# Altium PCB PCB_HUMA-mini.PcbDoc
Units mm, origin at the board's own origin, x right, y up, seen from the top; angles counter-clockwise.
Board outline 50 x 50 mm, 2 copper layers (Top Layer, Bottom Layer); 54 components, 58 nets, 188 pads, 30 vias.
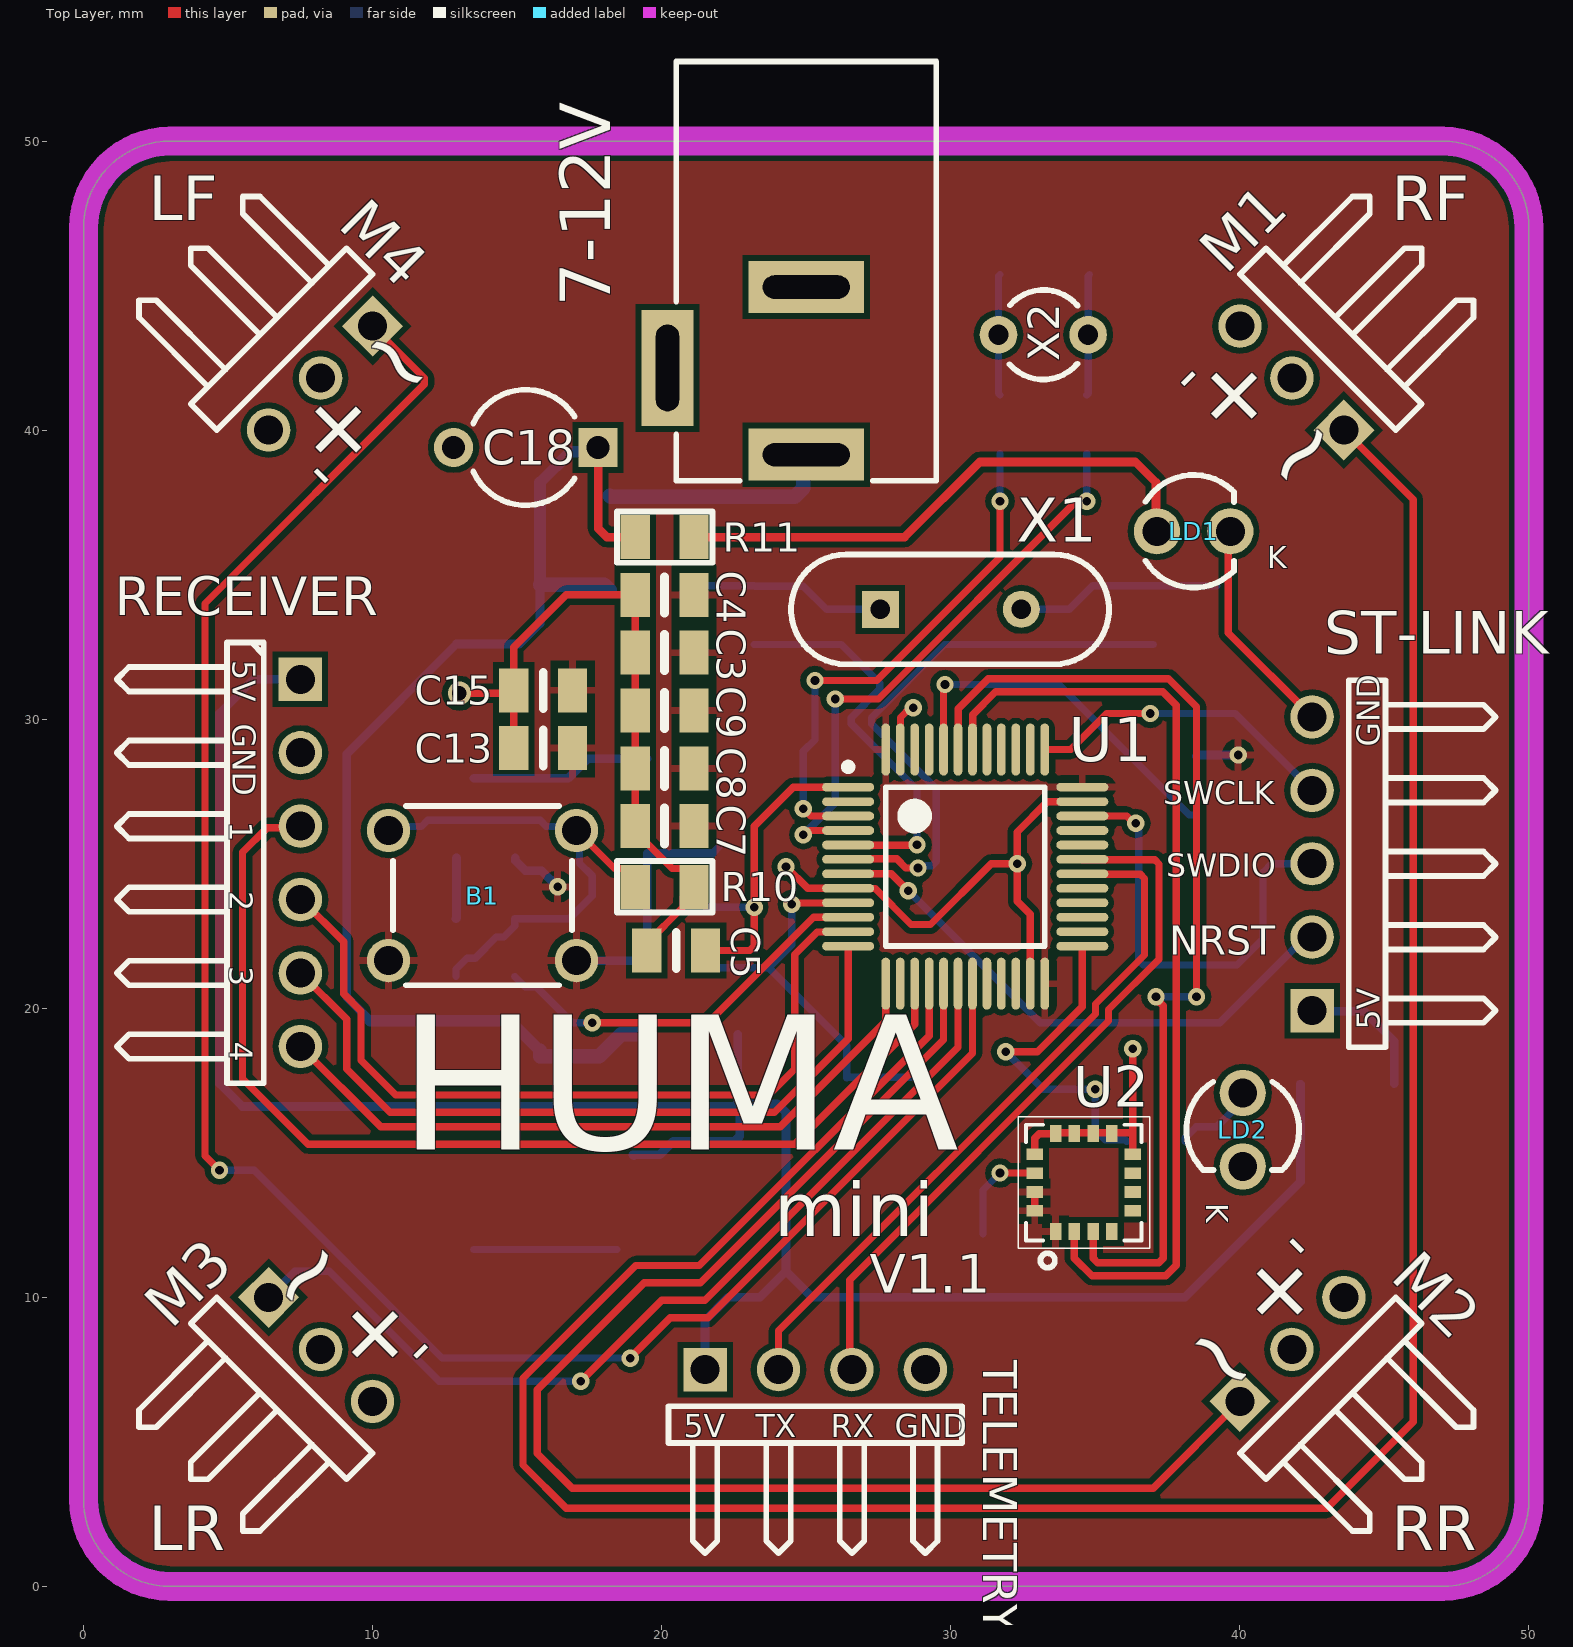
[diagram p0: Top Layer view]
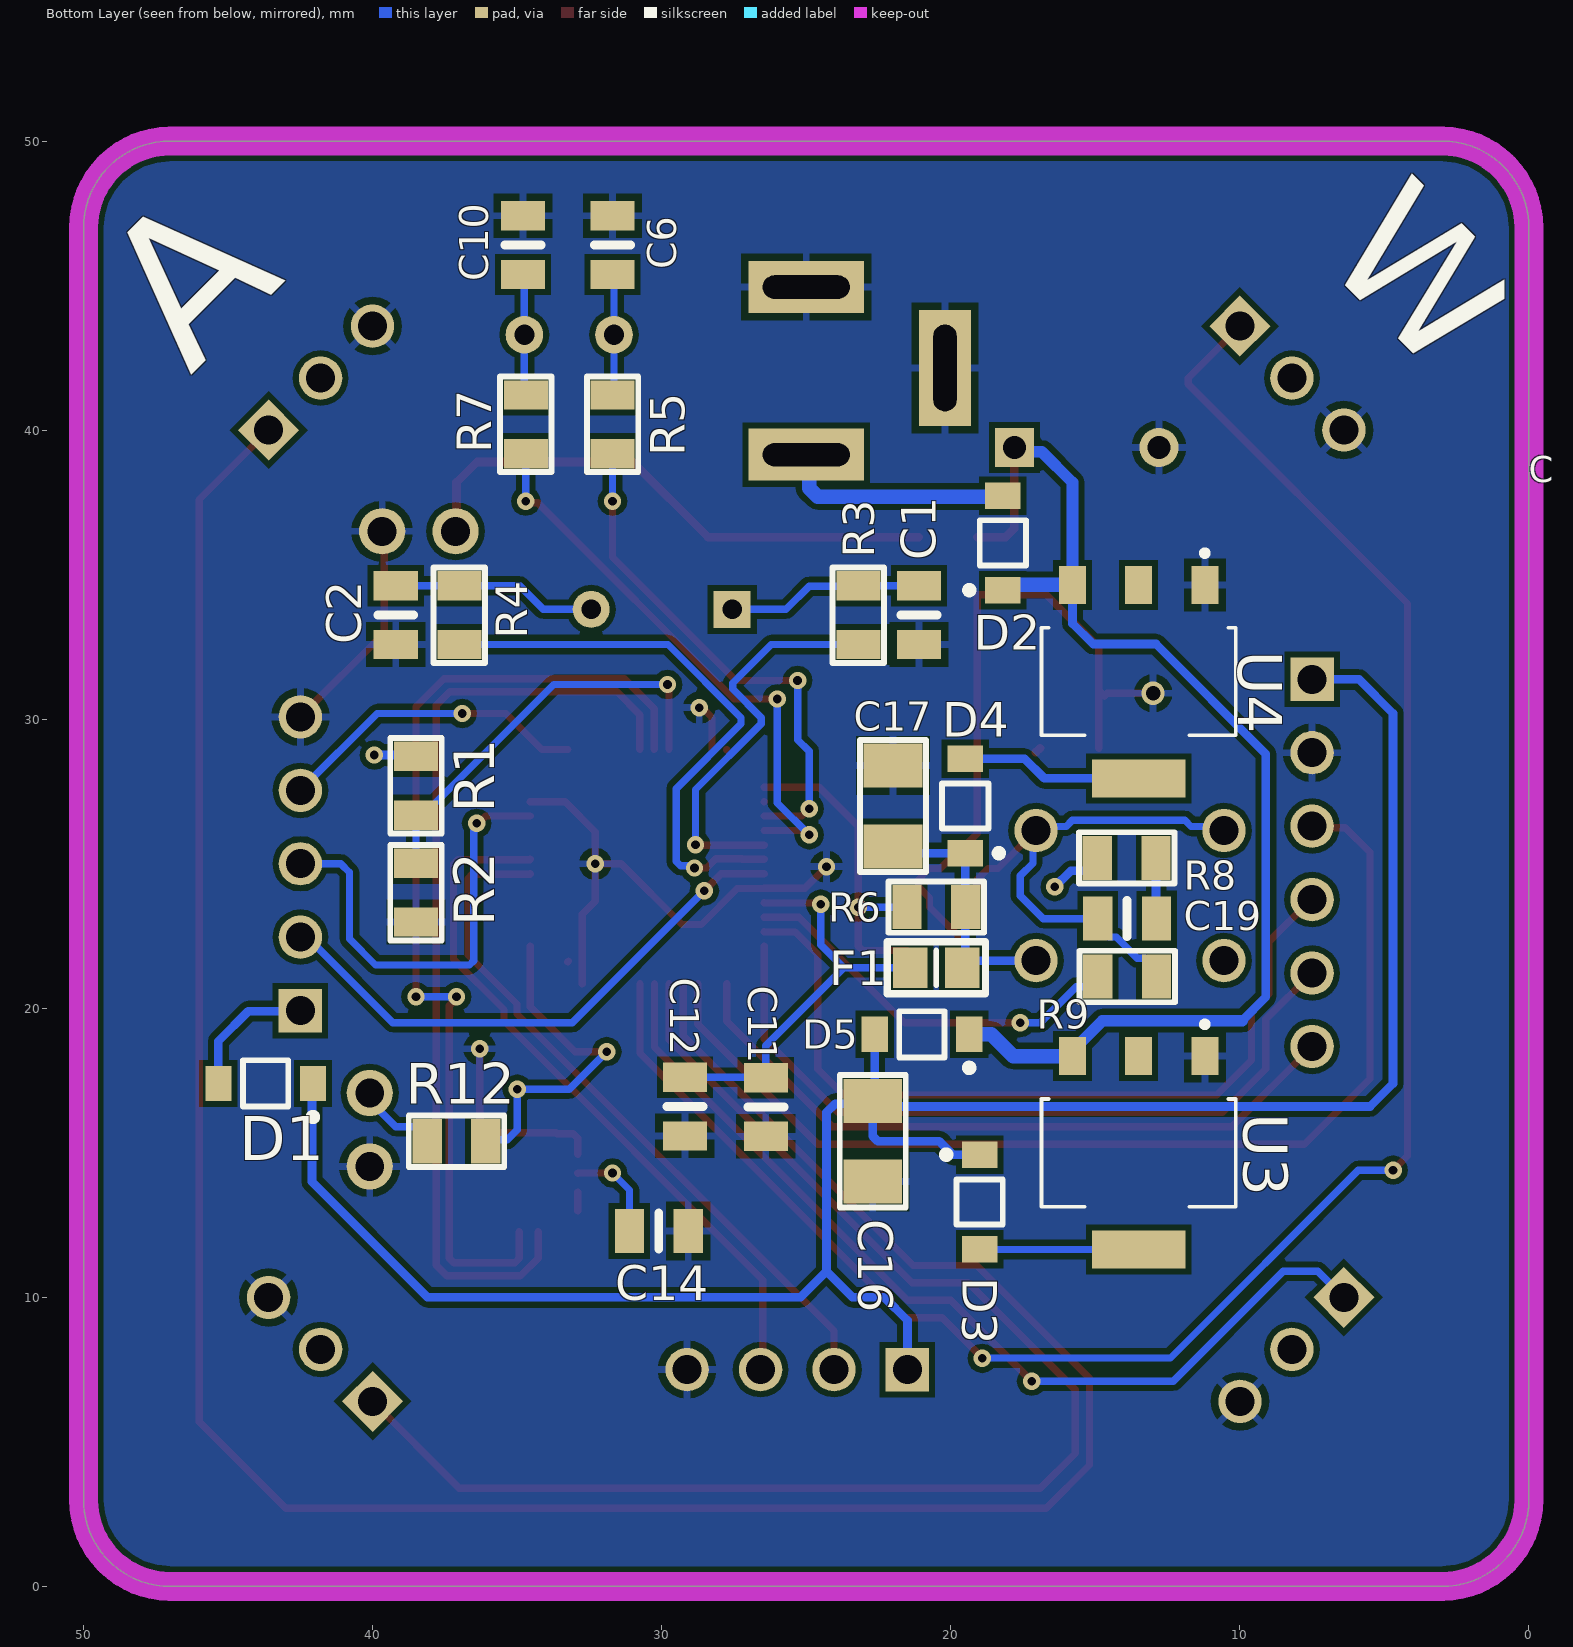
[diagram p1: Bottom Layer view, seen from below]
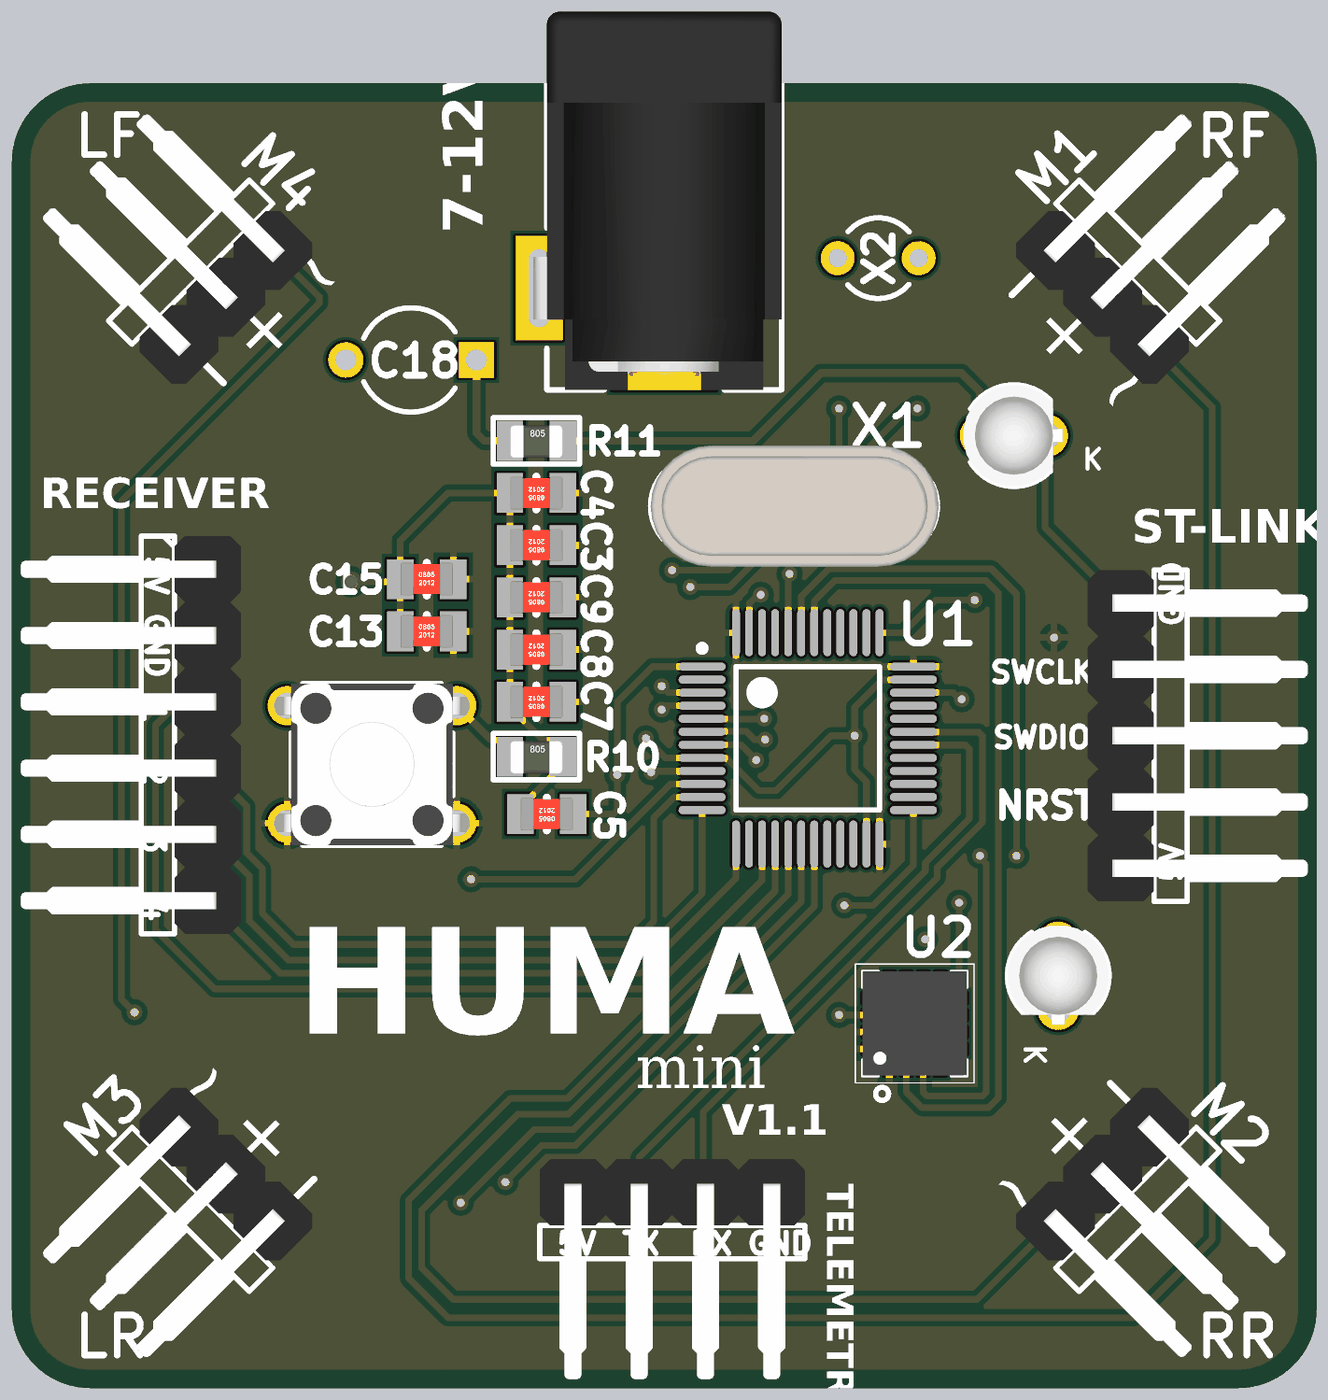
[diagram p2: 3D render of the assembled board from above, using the file's embedded part models]
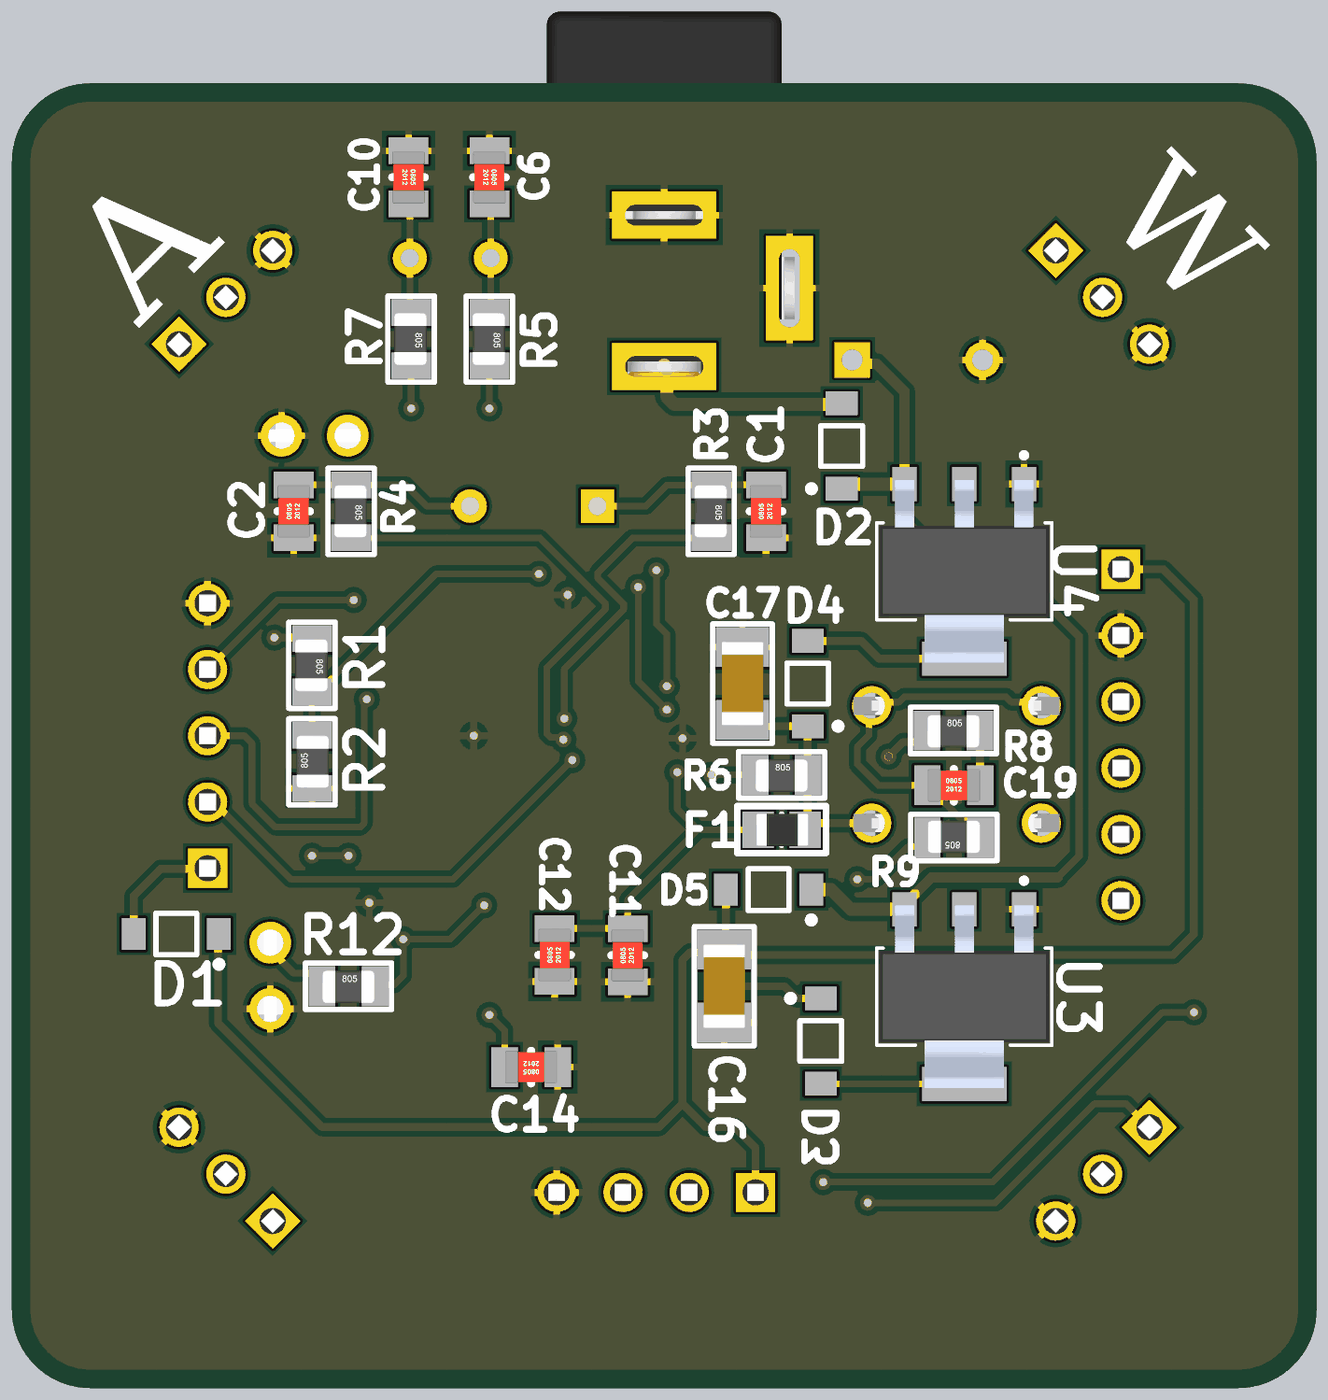
[diagram p3: 3D render of the assembled board from below, using the file's embedded part models]

## Layer stack, top to bottom
Top Solder: solder mask 0.0102, Solder Resist, Dk 3.5
Top Layer: signal copper 0.0356
Dielectric 1: dielectric 0.32, FR-4, Dk 4.8
Bottom Layer: signal copper 0.0356
Bottom Solder: solder mask 0.0102, Solder Resist, Dk 3.5

## Board outline
0,3 0,47 cw(c3,47) 3,50 47,50 cw(c47,47) 50,47 50,3 cw(c47,3) 47,0 3,0 cw(c3,3)

## Design rules (kind name [scope] priority, off if disabled: settings)
Clearance [All] p1: gap=0.2 ignorepadtopadclearanceinfootprint=FALSE except(0: Arc-Hole Track-Hole SMDPad-Hole THPad-Hole Via-Hole Fill-Hole Poly-Hole Region-Hole Text-Hole)
PolygonConnect [All] p1: connectstyle=Relief reliefconductorwidth=0.254 reliefentries=4 polygonreliefangle="90 Angle" airgapwidth=0.254
RoutingVias [All] p1: holewidth=0.711 width=1.27 viastyle="Through Hole" minholewidth=0.711 minwidth=1.27 maxholewidth=0.711 maxwidth=1.27
SolderMaskExpansion [All] p1: expansion=0.102 istentingtop=FALSE
Width [All] p1: maxlimit=0.5 minlimit=0.2 preferedwidth=0.254 minimp=50.000000 maximp=50.000000 favimp=50.000000
30 further rules are at their usual default settings.

## Classes and differential pairs
component class U_Power_HUMA: 7-12V C16 C17 C18 D2 D3 D4 D5 LD1 R11 U3 U4
component class U_Peripherals_HUMA: B1 C13 C14 C15 C19 D1 M1 M2 M3 M4 R8 R9 R10 RECEIVER ST-LINK TELEMETRY U2
component class Schematics_HUMA-mini: C1 C2 C3 C4 C5 C6 C7 C8 C9 C10 C11 C12 F1 LD2 R1 R2 R3 R4 R5 R6 R7 R12 U1 X1 X2

## Components (designator, comment, footprint, x,y, rotation, side; value= is the part's Value field where it differs from the comment)
7-12V "DC Power Jack" 694106301002 25,45.5 r180 top (schematic designator J8)
B1 "WS-TATV THT" 4301x60507x6 13.8,23.9 r180 top
C1 "20pF" SMD-0805C 21.1,33.6 r180 bottom
C2 "20pF" SMD-0805C 39.2,33.6 r180 bottom
C3 "0.10µF" SMD-0805C 20.1,32.3 r90 top
C4 "0.10µF" SMD-0805C 20.1,34.3 r90 top
C5 "1µF" SMD-0805C 20.5,22 r90 top
C6 "6.8pF" SMD-0805C 31.7,46.4 r0 bottom
C7 "0.10µF" SMD-0805C 20.1,26.3 r90 top
C8 "0.10µF" SMD-0805C 20.1,28.3 r90 top
C9 "0.10µF" SMD-0805C 20.1,30.3 r90 top
C10 "6.8pF" SMD-0805C 34.8,46.4 r0 bottom
C11 "1µF" SMD-0805C 26.4,16.584 r180 bottom
C12 "0.10µF" SMD-0805C 29.2,16.6 r180 bottom
C13 "0.10µF" SMD-0805C 15.9,29 r270 top
C14 "10000pF" SMD-0805C 30.1,12.3 r90 bottom
C15 "10µF" SMD-0805C 15.9,31 r270 top
C16 "22µF" SMD-1206C 22.7,15.4 r0 bottom
C17 "22µF" SMD-1206C 22,27 r180 bottom
C18 "Cap2" CAPR5-4X5 15.3,39.4 r180 top value=100uF
C19 "0.10µF" SMD-0805C 13.9,23.1 r270 bottom
D1 "MBR0520-HT" ONSC-SOD-123-2-425-04_V 43.7,17.4 r0 bottom
D2 "MBR0520-HT" ONSC-SOD-123-2-425-04_V 18.2,36.1 r90 bottom
D3 "MBR0520-HT" ONSC-SOD-123-2-425-04_V 19,13.3 r270 bottom
D4 "MBR0520-HT" ONSC-SOD-123-2-425-04_V 19.5,27 r90 bottom
D5 "MBR0520-HT" ONSC-SOD-123-2-425-04_V 21,19.1 r0 bottom
F1 "FERRITE BEAD 600 OHM 1206 1LN" IND_0805 20.5,21.4 r0 bottom
LD1 "Red" "Type 3mm" 38.4,36.5 r0 top
LD2 "Light Blue" "Type 3mm" 40.1,15.8 r270 top
M1 "ESC1 Connector" HDR1X3H 43.596,40.004 r135 top
M2 "ESC2 Connector" HDR1X3H 40.004,6.404 r45 top
M3 "ESC3 Connector" HDR1X3H 6.404,9.996 r315 top
M4 "ESC4 Connector" HDR1X3H 9.996,43.596 r225 top
R1 "10k" SMD-0805-RES 38.5,27.7 r0 bottom
R2 "510" SMD-0805-RES 38.5,24 r180 bottom
R3 "0.0" SMD-0805-RES 23.2,33.6 r0 bottom
R4 "220" SMD-0805-RES 37,33.6 r0 bottom
R5 "0.0" SMD-0805-RES 31.7,40.2 r0 bottom
R6 "0.0" SMD-0805-RES 20.5,23.5 r270 bottom
R7 "0.0" SMD-0805-RES 34.7,40.2 r0 bottom
R8 "100" SMD-0805-RES 13.916,25.2 r270 bottom
R9 "330" SMD-0805-RES 13.9,21.1 r90 bottom
R10 "220k" SMD-0805-RES 20.1,24.2 r270 top
R11 "470" SMD-0805-RES 20.1,36.3 r270 top
R12 "220" SMD-0805-RES 37.1,15.4 r270 bottom
RECEIVER "R9DS Receiver Connector" HDR1X6H 7.5,31.38 r270 top (schematic designator J7)
ST-LINK "Header 5H" HDR1X5H 42.5,19.92 r90 top (schematic designator J1)
TELEMETRY "433MHz Air Connector" HDR1X4H 21.5,7.5 r0 top (schematic designator J6)
U1 "STM32F303CCT6" STM-LQFP48_N 30.5,24.9 r0 top
U2 "L3GD20TR" LGA16C65P6X6_400X400X100 34.5,14 r90 top
U3 "AMS1117_5V" *SOT229P700X180-4N 13.5,15 r0 bottom
U4 "AMS1117_3V3" *SOT229P700X180-4N 13.5,31.3 r0 bottom
X1 "8MHz" OSC488W43P488L465H350Q2P 30,33.8 r0 top
X2 "XTAL" R38 33.2,43.3 r270 top value=32.768kHz

## Footprints (in the part's own frame and the unit in brackets; to place one, negate y for a bottom-side part, rotate by r counter-clockwise, add the part's x,y. Pads: shape width x height; smd on the part's side, far side on the other; paste and mask are expansions set on the pad)
4301x60507x6 [mm] "6x6mm Tact Switch, THT version"
  round 1.5 hole 1: 1(-3.25,2.25) 2(-3.25,-2.25) 3(3.25,2.25) 4(3.25,-2.25)
  silkscreen extent -3.1,-3.1 3.1,3.1, body extent -3.95,-3.1 3.95,3.1, height 5.05
694106301002 [mm] "DC Power Jack Right Angled(6.4)"
  rect 4x1.8 hole 0.8 slot 3 at 0 deg: 1(0,6.35) 2(0,0.55)
  rect 1.8x4 hole 0.8 slot 3 at 90 deg: 3(4.8,3.35)
  silkscreen extent -4.5,-7.25 4.5,7.25, body extent -4.5,-7.25 5,7.25, height 10.75
*SOT229P700X180-4N [mm]
  rect 0.93x1.31 smd: 1(-2.29,-3.345) 2(0,-3.345) 3(2.29,-3.345)
  rect 3.24x1.31 smd: 4(0,3.345)
  silkscreen extent -3.36,-4.54 3.36,1.86, body extent -3.25,-3.5 3.25,3.5, height 1.73
CAPR5-4X5 [mm] "Capacitor; 2 Leads"
  rect 1.35x1.35 hole 0.8: 1(-2.5,0)
  round 1.35 hole 0.8: 2(2.5,0)
  silkscreen extent -1.69,-2 1.82,2
HDR1X3H [mm] "Connector; Header; 3 Position; Right Angle"
  rect 1.5x1.5 hole 1.003: 1(0,0)
  round 1.5 hole 1.003: 2(2.54,0) 3(5.08,0)
  silkscreen extent -1.27,-6.35 6.35,-1.27, body extent -1.27,-7.17 6.35,1.27, height 4.76
HDR1X4H [mm] "Connector; Header; 4 Position; Right Angle"
  rect 1.5x1.5 hole 1.003: 1(0,0)
  round 1.5 hole 1.003: 2(2.54,0) 3(5.08,0) 4(7.62,0)
  silkscreen extent -1.27,-6.35 8.89,-1.27, body extent -1.27,-7.17 8.89,1.27, height 4.76
HDR1X5H [mm] "Connector; Header; 5 Position; Right Angle"
  rect 1.5x1.5 hole 1.003: 1(0,0)
  round 1.5 hole 1.003: 2(2.54,0) 3(5.08,0) 4(7.62,0) 5(10.16,0)
  silkscreen extent -1.27,-6.35 11.43,-1.27, body extent -1.27,-7.17 11.43,1.27, height 4.76
HDR1X6H [mm] "Connector; Header; 6 Position; Right Angle"
  rect 1.5x1.5 hole 1.003: 1(0,0)
  round 1.5 hole 1.003: 2(2.54,0) 3(5.08,0) 4(7.62,0) 5(10.16,0) 6(12.7,0)
  silkscreen extent -1.27,-6.35 13.97,-1.27, body extent -1.27,-7.17 13.97,1.27, height 4.76
IND_0805 [mm]
  rect 1.2x1.4 smd: 1(-0.9,0) 2(0.9,0)
  silkscreen extent -1.7,-0.9 1.7,0.9, body extent -1.03,-0.62 0.97,0.63, height 1
LGA16C65P6X6_400X400X100 [mm] "LGA, 16-Leads, Body 4,00x4,00mmx1,00mm, Pitch 0,65mm"
  rect 0.58x0.4 smd: 1(-1.725,0.875) 2(-1.725,0.225) 3(-1.725,-0.425) 4(-1.725,-1.075) 9(1.665,-1.075) 10(1.665,-0.425) 11(1.665,0.225) 12(1.665,0.875)
  rect 0.4x0.58 smd: 5(-1.005,-1.795) 6(-0.355,-1.795) 7(0.295,-1.795) 8(0.945,-1.795) 13(0.945,1.595) 14(0.295,1.595) 15(-0.355,1.595) 16(-1.005,1.595)
  silkscreen extent -2.97,-2.37 2.24,2.17, body extent -2.02,-2.1 1.98,1.9, height 1
ONSC-SOD-123-2-425-04_V [mm] "SOD, 2-Leads, Body 2.69x1.6mm"
  rect 0.91x1.22 smd: 1(-1.635,0) 2(1.635,0)
  silkscreen extent -1.76,-0.8 0.78,1.28, body extent -1.35,-0.8 1.35,0.8, height 1.35
OSC488W43P488L465H350Q2P [mm]
  rect 1.28x1.28 hole 0.68: 1(-2.44,0)
  round 1.28 hole 0.68: 2(2.44,0)
  silkscreen extent -5.52,-1.9 5.47,1.9, body extent -5.52,-2.32 5.53,2.33, height 3.5
R38 [mm] "Crystal, Thru-Hole; 2 Leads; Body 3.1 x 8.2 mm (Dia.xH)"
  round 1.3 hole 0.7: 1(0,-1.55) 2(0,1.55)
  silkscreen extent -1.55,-1.17 1.55,1.19
SMD-0805-RES [mil]
  rect 60x40 smd: 1(0,40) 2(0,-40)
  silkscreen extent -35,-65 35,65, body extent -24,-39 26,39, height 31
SMD-0805C [mil]
  rect 60x40 smd: 1(0,40) 2(0,-40)
  silkscreen extent -25,0 25,0, body extent -25,-39 25,39, height 35
SMD-1206C [mil]
  rect 80x60 smd: 1(0,-55) 2(0,55)
  silkscreen extent -45,-90 45,90, body extent -31,-63 32,63, height 39
STM-LQFP48_N [mm] "QFP, 48-Leads, Body 7x7mm, Pitch 0.5mm, IPC Medium Density"
  oval 1.8x0.3 smd: 1(-4.05,2.75) 2(-4.05,2.25) 3(-4.05,1.75) 4(-4.05,1.25) 5(-4.05,0.75) 6(-4.05,0.25) 7(-4.05,-0.25) 8(-4.05,-0.75) 9(-4.05,-1.25) 10(-4.05,-1.75) 11(-4.05,-2.25) 12(-4.05,-2.75) 25(4.05,-2.75) 26(4.05,-2.25) 27(4.05,-1.75) 28(4.05,-1.25) 29(4.05,-0.75) 30(4.05,-0.25) 31(4.05,0.25) 32(4.05,0.75) 33(4.05,1.25) 34(4.05,1.75) 35(4.05,2.25) 36(4.05,2.75)
  oval 0.3x1.8 smd: 13(-2.75,-4.05) 14(-2.25,-4.05) 15(-1.75,-4.05) 16(-1.25,-4.05) 17(-0.75,-4.05) 18(-0.25,-4.05) 19(0.25,-4.05) 20(0.75,-4.05) 21(1.25,-4.05) 22(1.75,-4.05) 23(2.25,-4.05) 24(2.75,-4.05) 37(2.75,4.05) 38(2.25,4.05) 39(1.75,4.05) 40(1.25,4.05) 41(0.75,4.05) 42(0.25,4.05) 43(-0.25,4.05) 44(-0.75,4.05) 45(-1.25,4.05) 46(-1.75,4.05) 47(-2.25,4.05) 48(-2.75,4.05)
  silkscreen extent -4.17,-2.75 2.75,3.57, body extent -3.5,-3.5 3.5,3.5, height 1.6
"Type 3mm" [mm] "THT, LED-3mm, 2pin- Body 4.15mm(max)"
  round 1.6 hole 1: 1(1.27,0) 2(-1.27,0)
  silkscreen extent -1.66,-1.95 1.4,1.95, body extent -1.93,-1.94 1.87,1.94, height 10.9

## Part data
7-12V: library part 694106301002, "DC Power Jack Connector WR-DC, Male, Right Angled, THT, 5 A, 24 V", Operating Temperature="-40 to 85 degC", Rated Current="5 A", Working Voltage="24 V", ComponentLink1Description=Manufacturer, ComponentLink1URL=http://www.we-online.de, ComponentLink2Description=Datasheet, ComponentLink2URL=http://katalog.we-online.de/em/datasheet/6941xx301002.pdf, Gender=Male, Mounting Technology=THT, Opening Diameter="6.4 mm", Orientation="Right Angled", Packaging=Bag, Part Number=694106301002, Plug Inner Diameter="2.05 mm", Plug Outer Diameter="5.5 mm", Published Date="August 2018", Publisher="Wurth Elektronik"
B1: library part 430156050726, "WS-TATV THT Tact Switch 6x6mm, height 5mm, 260gf", Operating Temperature="-40 to +85degC", Rated Current=50mA, Rated Voltage=12VDC, ComponentLink1Description=Manufacturer, ComponentLink1URL=http://www.we-online.de, ComponentLink2Description=Datasheet, ComponentLink2URL=https://katalog.we-online.com/em/datasheet/430156050726.pdf, Contact Material="Stainless Steel", Contact Plating=Silver, Height=5mm, Mounting Technology=THT, Operation Force=260gf, Packaging=Bulk, Part Number=430156050726, Published Date="September 2019", Publisher="Wurth Elektronik", Terminal Material="Copper Alloy", Terminal Plating=Silver, Washable=No
C1 C2: library part GQM2195C1H200JB01D, "CAP CER 20PF 50V NP0 0805", Digi-Key Part Number=490-3607-1-ND, Manufacturer="Murata Electronics North America", Operating Temperature="-55°C ~ 125°C", Package / Case="0805 (2012 Metric)", Ratings=-, Temperature Coefficient="C0G, NP0", Tolerance=±5%, Voltage=50V, @ qty=0, Applications="RF, Microwave, High Frequency", Datasheets=http://www.murata.com/~/media/webrenewal/support/library/catalog/products/capacitor/mlcc/c02e.pdf, Factory Stock=0, Features="High Q, Low Loss", Height - Seated (Max)=-, Image=//media.digikey.com/Renders/Murata%20Renders/0805(GxM9).jpg, Lead Spacing=-, Lead Style=-, Minimum Quantity=1, Mounting Type="Surface Mount, MLCC", Packaging="Cut Tape (CT)", Part Number=GQM2195C1H200JB01D, Part Status=Active, Quantity Available=270, Series=GQM, Size / Dimension="0.079\" L x 0.049\" W (2.00mm x 1.25mm)", Thickness (Max)="0.037\" (0.95mm)", Unit Price (USD)=0.78
C3 C4 C7 C8 C9 C12 C13: library part GRM219R71E104KA01D, "CAP CER 0.1UF 25V X7R 0805", Digi-Key Part Number=490-12754-1-ND, Manufacturer="Murata Electronics North America", Operating Temperature="-55°C ~ 125°C", Package / Case="0805 (2012 Metric)", Ratings=-, Temperature Coefficient=X7R, Tolerance=±10%, Voltage=25V, @ qty=0, Applications="General Purpose", Datasheets=http://www.murata.com/~/media/webrenewal/support/library/catalog/products/capacitor/mlcc/c02e.pdf, Factory Stock=0, Features=-, Height - Seated (Max)=-, Image=//media.digikey.com/Renders/Murata%20Renders/0805%20(2012%20Metric)%20.85mm.jpg, Lead Spacing=-, Lead Style=-, Minimum Quantity=1, Mounting Type="Surface Mount, MLCC", Packaging="Cut Tape (CT)", Part Number=GRM219R71E104KA01D, Part Status=Active, Quantity Available=8594, Series=GRM, Size / Dimension="0.079\" L x 0.049\" W (2.00mm x 1.25mm)", Thickness (Max)="0.037\" (0.95mm)", Unit Price (USD)=0.12
C5 C11: library part GRT21BR61E105KE13L, "CAP CER 1UF 25V X5R 0805", Digi-Key Part Number=490-12386-1-ND, Manufacturer="Murata Electronics North America", Operating Temperature="-55°C ~ 85°C", Package / Case="0805 (2012 Metric)", Ratings=AEC-Q200, Temperature Coefficient=X5R, Tolerance=±10%, Voltage=25V, @ qty=0, Applications=Automotive, Datasheets=http://search.murata.co.jp/Ceramy/image/img/A01X/G101/ENG/GRT21BR61E105KE13-01.pdf, Factory Stock=0, Features=-, Height - Seated (Max)=-, Image=//media.digikey.com/Renders/Murata%20Renders/GRT%20Series%200805(2012%20Metric).jpg, Lead Spacing=-, Lead Style=-, Minimum Quantity=1, Mounting Type="Surface Mount, MLCC", Packaging="Cut Tape (CT)", Part Number=GRT21BR61E105KE13L, Part Status=Active, Quantity Available=2725, Series=GRT, Size / Dimension="0.079\" L x 0.049\" W (2.00mm x 1.25mm)", Thickness (Max)="0.057\" (1.45mm)", Unit Price (USD)=0.2
C6 C10: library part GQM2195C2A6R8DB01D, "CAP CER 6.8PF 100V NP0 0805", Digi-Key Part Number=490-8142-1-ND, Manufacturer="Murata Electronics North America", Operating Temperature="-55°C ~ 125°C", Package / Case="0805 (2012 Metric)", Ratings=-, Temperature Coefficient="C0G, NP0", Tolerance=±0.5pF, Voltage=100V, @ qty=0, Applications="RF, Microwave, High Frequency", Datasheets=http://www.murata.com/~/media/webrenewal/support/library/catalog/products/capacitor/mlcc/c02e.pdf, Factory Stock=0, Features="High Q, Low Loss", Height - Seated (Max)=-, Image=//media.digikey.com/Renders/Murata%20Renders/0805(GxM9).jpg, Lead Spacing=-, Lead Style=-, Minimum Quantity=1, Mounting Type="Surface Mount, MLCC", Packaging="Cut Tape (CT)", Part Number=GQM2195C2A6R8DB01D, Part Status=Active, Quantity Available=3756, Series=GQM, Size / Dimension="0.079\" L x 0.049\" W (2.00mm x 1.25mm)", Thickness (Max)="0.037\" (0.95mm)", Unit Price (USD)=0.71
C14: library part LLA215R71E103MA14L, "CAP CER 10000PF 25V X7R 0805", Digi-Key Part Number=490-4424-1-ND, Manufacturer="Murata Electronics North America", Operating Temperature="-55°C ~ 125°C", Package / Case="0805 (2012 Metric)", Ratings=-, Temperature Coefficient=X7R, Tolerance=±20%, Voltage=25V, @ qty=0, Applications="Bypass, Decoupling", Datasheets=http://www.murata.com/~/media/webrenewal/support/library/catalog/products/capacitor/mlcc/c02e.pdf, Factory Stock=0, Features="Low ESL (Multi-Terminal)", Height - Seated (Max)=-, Image=//media.digikey.com/Renders/Murata%20Renders/0805-LLA.jpg, Lead Spacing=-, Lead Style=-, Minimum Quantity=1, Mounting Type="Surface Mount, MLCC", Packaging="Cut Tape (CT)", Part Number=LLA215R71E103MA14L, Part Status=Active, Quantity Available=28252, Series=LLA, Size / Dimension="0.079\" L x 0.049\" W (2.00mm x 1.25mm)", Thickness (Max)="0.022\" (0.55mm)", Unit Price (USD)=0.33
C15: library part GRM21BC81C106KA73L, "CAP CER 10UF 16V X6S 0805", Digi-Key Part Number=490-5519-1-ND, Manufacturer="Murata Electronics North America", Operating Temperature="-55°C ~ 105°C", Package / Case="0805 (2012 Metric)", Ratings=-, Temperature Coefficient=X6S, Tolerance=±10%, Voltage=16V, @ qty=0, Applications="General Purpose", Datasheets=http://www.murata.com/~/media/webrenewal/support/library/catalog/products/capacitor/mlcc/c02e.pdf, Factory Stock=0, Features=-, Height - Seated (Max)=-, Image=//media.digikey.com/Renders/Murata%20Renders/0805%20(2012%20Metric)%20.85mm.jpg, Lead Spacing=-, Lead Style=-, Minimum Quantity=1, Mounting Type="Surface Mount, MLCC", Packaging="Cut Tape (CT)", Part Number=GRM21BC81C106KA73L, Part Status=Active, Quantity Available=118069, Series=GRM, Size / Dimension="0.079\" L x 0.049\" W (2.00mm x 1.25mm)", Thickness (Max)="0.053\" (1.35mm)", Unit Price (USD)=0.2
C16 C17: library part GRM31CR71A226ME15L, "CAP CER 22UF 10V X7R 1206", Digi-Key Part Number=490-6516-1-ND, Manufacturer="Murata Electronics North America", Operating Temperature="-55°C ~ 125°C", Package / Case="1206 (3216 Metric)", Ratings=-, Temperature Coefficient=X7R, Tolerance=±20%, Voltage=10V, @ qty=0, Applications="General Purpose", Datasheets=http://www.murata.com/~/media/webrenewal/support/library/catalog/products/capacitor/mlcc/c02e.pdf, Factory Stock=0, Features=-, Height - Seated (Max)=-, Image=//media.digikey.com/Renders/Murata%20Renders/GR331BD72E473KW01L.jpg, Lead Spacing=-, Lead Style=-, Minimum Quantity=1, Mounting Type="Surface Mount, MLCC", Packaging="Cut Tape (CT)", Part Number=GRM31CR71A226ME15L, Part Status=Active, Quantity Available=107, Series=GRM, Size / Dimension="0.126\" L x 0.063\" W (3.20mm x 1.60mm)", Thickness (Max)="0.071\" (1.80mm)", Unit Price (USD)=0.51
C18: "Capacitor", PackageDescription="Capacitor; 2 Leads", PackageReference=CAPR5-4X5, Published=23-Sep-2002, Publisher="Altium Limited"
C19: library part GRM21B7U1A104JA01L, "CAP CER 0.1UF 10V U2J 0805", Digi-Key Part Number=490-11592-1-ND, Manufacturer="Murata Electronics North America", Operating Temperature="-55°C ~ 125°C", Package / Case="0805 (2012 Metric)", Ratings=-, Temperature Coefficient=U2J, Tolerance=±5%, Voltage=10V, @ qty=0, Applications="General Purpose", Datasheets=http://www.murata.com/~/media/webrenewal/support/library/catalog/products/capacitor/mlcc/c02e.pdf, Factory Stock=0, Features=-, Height - Seated (Max)=-, Image=//media.digikey.com/Renders/Murata%20Renders/0805%20(2012%20Metric)%20.85mm.jpg, Lead Spacing=-, Lead Style=-, Minimum Quantity=1, Mounting Type="Surface Mount, MLCC", Packaging="Cut Tape (CT)", Part Number=GRM21B7U1A104JA01L, Part Status=Active, Quantity Available=3390, Series=GRM, Size / Dimension="0.079\" L x 0.049\" W (2.00mm x 1.25mm)", Thickness (Max)="0.053\" (1.35mm)", Unit Price (USD)=0.4
D1 D2 D3 D4 D5: library part MBR0520LT1, "20V 0.5A Schottky Power Rectifier, 2-Pin SOD-123, Tape and Reel", Manufacturer="On Semiconductor", Supplier Part Number 1=MBR0520LT1OSCT-ND, ComponentLink1Description="Manufacturer URL", ComponentLink1URL=http://www.onsemi.com/, ComponentLink2Description=Datasheet, ComponentLink2URL=http://www.onsemi.cn/pub_link/Collateral/MBR0520LT1-D.PDF, ComponentLink3Description="Package Specification", ComponentLink3URL=http://www.onsemi.com/pub_link/Collateral/425-04.PDF, Configuration=Single, DatasheetVersion="Rev. 6", IFSM Max (A)=5.5, Mounting Technology="Surface Mount", PackageDescription="2-Pin SOD, Body 1.6 x 2.69 mm", PackageReference=SOD-123-2-425-04, PackageVersion="Rev. G, 10/2009", Packing="Tape and Reel", PartNumber=MBR0520LT1, RoHS=FALSE, Supplier 1=Digi-Key
F1: library part "Ferrite 600ohm 1206(742792118)", "600 Ohms @ 100MHz 1 Signal Line Ferrite Bead 1206 (3216 Metric) 2.5A 70mOhm", +Sicaklik=+125, -Sicaklik=-55, Cins=Ferrite, Deger=600R, Epoksi Bilgisi=YOK, Kaplama Bilgisi=UYGUN, Kılıf=1206, Lehim Yöntemi=SMD, MSL="1 (Unlimited)", Nero Kodu=NE-S-02777, Uretici Kodu=742792118, Yıkama Bilgisi=UYGUN
LD1: library part 151033RS03000, "THT LED round mono-color waterclear, WL-TMRW, Red", ComponentLink1Description="Manufacturer URL", ComponentLink1URL=http://www.we-online.com, ComponentLink2Description=Datasheet, ComponentLink2URL=http://katalog.we-online.de/pbs/datasheet/7448042001.pdfhttp://katalog.we-online.de/pbs/datasheet/7448042001.pdfhttp://katalog.we-online.de/pbs/datasheet/7448042001.pdfhttp://katalog.we-online.de/pbs/datasheet/151033RS03000.pdf, Emitting color=Red, PackageReference="Type 3mm", PartNumber=151033RS03000
LD2: library part 151033BS03000, "THT LED round mono-color waterclear, WL-TMRW , Blue", Emitting color=Blue, ComponentLink1Description="Manufacturer URL", ComponentLink1URL=http://www.we-online.com, ComponentLink2Description=Datasheet, ComponentLink2URL=http://katalog.we-online.de/pbs/datasheet/7448042001.pdfhttp://katalog.we-online.de/pbs/datasheet/7448042001.pdfhttp://katalog.we-online.de/pbs/datasheet/7448042001.pdfhttp://katalog.we-online.de/pbs/datasheet/151033BS03000.pdf, PackageReference="Type 3mm", PartNumber=151033BS03000
M1 M2 M3 M4: library part "Header 3H", "Header, 3-Pin, Right Angle", LatestRevisionDate=17-Jul-2002, LatestRevisionNote="Re-released for DXP Platform.", Publisher="Altium Limited"
R1: library part ERJ-6ENF1002V, "RES SMD 10K OHM 1% 1/8W 0805", Digi-Key Part Number=P10.0KCCT-ND, Manufacturer="Panasonic Electronic Components", Operating Temperature="-55°C ~ 155°C", Package / Case="0805 (2012 Metric)", Power (Watts)="0.125W, 1/8W", Supplier Device Package=0805, Temperature Coefficient=±100ppm/°C, Tolerance=±1%, @ qty=1500, Composition="Thick Film", Datasheets=http://industrial.panasonic.com/www-cgi/jvcr13pz.cgi?E+PZ+3+AOA0002+ERJ6ENF1002V+7+WW, Factory Stock=0, Failure Rate=-, Features="Automotive AEC-Q200", Height - Seated (Max)="0.028\" (0.70mm)", Image=//media.digikey.com/Renders/Panasonic%20Renders/ERJ-0805%20Pkg.jpg, Minimum Quantity=1, Number of Terminations=2, Packaging="Cut Tape (CT)", Part Number=ERJ-6ENF1002V, Part Status=Active, Quantity Available=3985614, Series=ERJ, Size / Dimension="0.079\" L x 0.049\" W (2.00mm x 1.25mm)", Unit Price (USD)=0.00729
R2: library part ERJ-P06J511V, "RES SMD 510 OHM 5% 1/2W 0805", Digi-Key Part Number=P510ADCT-ND, Manufacturer="Panasonic Electronic Components", Operating Temperature="-55°C ~ 155°C", Package / Case="0805 (2012 Metric)", Power (Watts)="0.5W, 1/2W", Supplier Device Package=0805, Temperature Coefficient=±200ppm/°C, Tolerance=±5%, @ qty=1500, Composition="Thick Film", Datasheets=https://industrial.panasonic.com/cdbs/www-data/pdf/RDA0000/AOA0000C243.pdf, Factory Stock=0, Failure Rate=-, Features="Automotive AEC-Q200, Pulse Withstanding", Height - Seated (Max)="0.028\" (0.70mm)", Image=//media.digikey.com/Renders/Panasonic%20Renders/ERJ-0805%20Pkg.jpg, Minimum Quantity=1, Number of Terminations=2, Packaging="Cut Tape (CT)", Part Number=ERJ-P06J511V, Part Status=Active, Quantity Available=54515, Series=ERJ, Size / Dimension="0.079\" L x 0.049\" W (2.00mm x 1.25mm)", Unit Price (USD)=0.01839
R3 R5 R6 R7: library part ERJ-6GEY0R00V, "RES SMD 0.0 OHM JUMPER 1/8W 0805", Digi-Key Part Number=P0.0ACT-ND, Manufacturer="Panasonic Electronic Components", Operating Temperature="-55°C ~ 155°C", Package / Case="0805 (2012 Metric)", Power (Watts)="0.125W, 1/8W", Supplier Device Package=0805, Temperature Coefficient=-, Tolerance=Jumper, @ qty=1500, Composition="Thick Film", Datasheets=http://industrial.panasonic.com/www-cgi/jvcr13pz.cgi?E+PZ+3+AOA0001+ERJ6GEY0R00V+7+WW, Factory Stock=0, Failure Rate=-, Features="Automotive AEC-Q200", Height - Seated (Max)="0.028\" (0.70mm)", Image=//media.digikey.com/Renders/Panasonic%20Renders/ERJ-0805%20Pkg.jpg, Minimum Quantity=1, Number of Terminations=2, Packaging="Cut Tape (CT)", Part Number=ERJ-6GEY0R00V, Part Status=Active, Quantity Available=1597627, Series=ERJ, Size / Dimension="0.079\" L x 0.049\" W (2.00mm x 1.25mm)", Unit Price (USD)=0.00544
R4: library part ERJ-6ENF2200V, "RES SMD 220 OHM 1% 1/8W 0805", Digi-Key Part Number=P220CCT-ND, Manufacturer="Panasonic Electronic Components", Operating Temperature="-55°C ~ 155°C", Package / Case="0805 (2012 Metric)", Power (Watts)="0.125W, 1/8W", Supplier Device Package=0805, Temperature Coefficient=±100ppm/°C, Tolerance=±1%, @ qty=1500, Composition="Thick Film", Datasheets=http://industrial.panasonic.com/www-cgi/jvcr13pz.cgi?E+PZ+3+AOA0002+ERJ6ENF2200V+7+WW, Factory Stock=0, Failure Rate=-, Features="Automotive AEC-Q200", Height - Seated (Max)="0.028\" (0.70mm)", Image=//media.digikey.com/Renders/Panasonic%20Renders/ERJ-0805%20Pkg.jpg, Minimum Quantity=1, Number of Terminations=2, Packaging="Cut Tape (CT)", Part Number=ERJ-6ENF2200V, Part Status=Active, Quantity Available=111570, Series=ERJ, Size / Dimension="0.079\" L x 0.049\" W (2.00mm x 1.25mm)", Unit Price (USD)=0.00729
R8: library part ERJ-P06J101V, "RES SMD 100 OHM 5% 1/2W 0805", Digi-Key Part Number=P100ADCT-ND, Manufacturer="Panasonic Electronic Components", Operating Temperature="-55°C ~ 155°C", Package / Case="0805 (2012 Metric)", Power (Watts)="0.5W, 1/2W", Supplier Device Package=0805, Temperature Coefficient=±200ppm/°C, Tolerance=±5%, @ qty=1500, Composition="Thick Film", Datasheets=https://industrial.panasonic.com/cdbs/www-data/pdf/RDA0000/AOA0000C243.pdf, Factory Stock=0, Failure Rate=-, Features="Automotive AEC-Q200, Pulse Withstanding", Height - Seated (Max)="0.028\" (0.70mm)", Image=//media.digikey.com/Renders/Panasonic%20Renders/ERJ-0805%20Pkg.jpg, Minimum Quantity=1, Number of Terminations=2, Packaging="Cut Tape (CT)", Part Number=ERJ-P06J101V, Part Status=Active, Quantity Available=127985, Series=ERJ, Size / Dimension="0.079\" L x 0.049\" W (2.00mm x 1.25mm)", Unit Price (USD)=0.01839
R9: library part ERJ-P6WJ331V, "RES SMD 330 OHM 5% 1/2W 0805", Digi-Key Part Number=P16948CT-ND, Manufacturer="Panasonic Electronic Components", Operating Temperature="-55°C ~ 155°C", Package / Case="0805 (2012 Metric)", Power (Watts)="0.5W, 1/2W", Supplier Device Package=0805, Temperature Coefficient=±200ppm/°C, Tolerance=±5%, @ qty=1500, Composition="Thick Film", Datasheets=https://industrial.panasonic.com/cdbs/www-data/pdf/RDA0000/AOA0000C243.pdf, Factory Stock=0, Failure Rate=-, Features="Automotive AEC-Q200, Pulse Withstanding", Height - Seated (Max)="0.030\" (0.75mm)", Image=//media.digikey.com/Renders/Panasonic%20Renders/ERJ-0805%20Pkg.jpg, Minimum Quantity=1, Number of Terminations=2, Packaging="Cut Tape (CT)", Part Number=ERJ-P6WJ331V, Part Status=Active, Quantity Available=4857, Series=ERJ, Size / Dimension="0.079\" L x 0.049\" W (2.00mm x 1.25mm)", Unit Price (USD)=0.08237
R10: library part ERJ-P06J224V, "RES SMD 220K OHM 5% 1/2W 0805", Digi-Key Part Number=P220KADCT-ND, Manufacturer="Panasonic Electronic Components", Operating Temperature="-55°C ~ 155°C", Package / Case="0805 (2012 Metric)", Power (Watts)="0.5W, 1/2W", Supplier Device Package=0805, Temperature Coefficient=±200ppm/°C, Tolerance=±5%, @ qty=1500, Composition="Thick Film", Datasheets=https://industrial.panasonic.com/cdbs/www-data/pdf/RDA0000/AOA0000C243.pdf, Factory Stock=0, Failure Rate=-, Features="Automotive AEC-Q200, Pulse Withstanding", Height - Seated (Max)="0.028\" (0.70mm)", Image=//media.digikey.com/Renders/Panasonic%20Renders/ERJ-0805%20Pkg.jpg, Minimum Quantity=1, Number of Terminations=2, Packaging="Cut Tape (CT)", Part Number=ERJ-P06J224V, Part Status=Active, Quantity Available=20074, Series=ERJ, Size / Dimension="0.079\" L x 0.049\" W (2.00mm x 1.25mm)", Unit Price (USD)=0.01839
R11: library part ERJ-P6WJ471V, "RES SMD 470 OHM 5% 1/2W 0805", Digi-Key Part Number=P16950CT-ND, Manufacturer="Panasonic Electronic Components", Operating Temperature="-55°C ~ 155°C", Package / Case="0805 (2012 Metric)", Power (Watts)="0.5W, 1/2W", Supplier Device Package=0805, Temperature Coefficient=±200ppm/°C, Tolerance=±5%, @ qty=1500, Composition="Thick Film", Datasheets=https://industrial.panasonic.com/cdbs/www-data/pdf/RDA0000/AOA0000C243.pdf, Factory Stock=0, Failure Rate=-, Features="Automotive AEC-Q200, Pulse Withstanding", Height - Seated (Max)="0.030\" (0.75mm)", Image=//media.digikey.com/Renders/Panasonic%20Renders/ERJ-0805%20Pkg.jpg, Minimum Quantity=1, Number of Terminations=2, Packaging="Cut Tape (CT)", Part Number=ERJ-P6WJ471V, Part Status=Active, Quantity Available=4195, Series=ERJ, Size / Dimension="0.079\" L x 0.049\" W (2.00mm x 1.25mm)", Unit Price (USD)=0.08237
R12: library part ERJ-P6WJ221V, "RES SMD 220 OHM 5% 1/2W 0805", Digi-Key Part Number=P16946CT-ND, Manufacturer="Panasonic Electronic Components", Operating Temperature="-55°C ~ 155°C", Package / Case="0805 (2012 Metric)", Power (Watts)="0.5W, 1/2W", Supplier Device Package=0805, Temperature Coefficient=±200ppm/°C, Tolerance=±5%, @ qty=1500, Composition="Thick Film", Datasheets=https://industrial.panasonic.com/cdbs/www-data/pdf/RDA0000/AOA0000C243.pdf, Factory Stock=0, Failure Rate=-, Features="Automotive AEC-Q200, Pulse Withstanding", Height - Seated (Max)="0.030\" (0.75mm)", Image=//media.digikey.com/Renders/Panasonic%20Renders/ERJ-0805%20Pkg.jpg, Minimum Quantity=1, Number of Terminations=2, Packaging="Cut Tape (CT)", Part Number=ERJ-P6WJ221V, Part Status=Active, Quantity Available=4990, Series=ERJ, Size / Dimension="0.079\" L x 0.049\" W (2.00mm x 1.25mm)", Unit Price (USD)=0.08237
RECEIVER: library part "Header 6H", "Header, 6-Pin, Right Angle", LatestRevisionDate=17-Jul-2002, LatestRevisionNote="Re-released for DXP Platform.", Publisher="Altium Limited"
ST-LINK: "Header, 5-Pin, Right Angle", LatestRevisionDate=17-Jul-2002, LatestRevisionNote="Re-released for DXP Platform.", Publisher="Altium Limited"
TELEMETRY: library part "Header 4H", "Header, 4-Pin, Right Angle", LatestRevisionDate=17-Jul-2002, LatestRevisionNote="Re-released for DXP Platform.", Publisher="Altium Limited"
U1: "ARM Cortex-M4 32-bit MCU, 256 KB Flash, 40 KB Internal RAM, 37 I/Os, 48-pin LQFP, -40 to 85 degC, Tray", I/Os (High Current)=37, Operating Frequency(F) (Processor speed) (MHz)=72, Supplier Part Number 1=497-13318-ND, Supply Voltage(Vcc) min (V)=2, ComponentLink1Description="Manufacturer URL", ComponentLink1URL=http://www.st.com/web/en/home.html, ComponentLink2Description=Datasheet, ComponentLink2URL=http://www.st.com/st-web-ui/static/active/en/resource/technical/document/datasheet/DM00058181.pdf, ComponentLink3Description="Package Specification", ComponentLink3URL=http://www.st.com/st-web-ui/static/active/en/resource/technical/document/datasheet/DM00058181.pdf, Core="ARM Cortex-M4", D/A Converter="2x12-bit (2 Channel)", DatasheetVersion="Rev. 6", FLASH Size (Prog) (kB)=256, Internal RAM Size (kB)=40, Mounting Technology="Surface Mount", PackageDescription="48-Pin Low Profile Quad Flat Package, 7 x 7 mm Body, 0.5 mm Pitch", PackageReference=LQFP48, PackageVersion="Rev. 6, 06/2013", Packing=Tray, PartNumber=STM32F303CCT6, Supplier 1=Digi-Key, Supplier 2=Newark, Supplier 3=Newark, Supplier 4=Mouser, Supplier Part Number 2=46W2192, Supplier Part Number 3=66W7286, Supplier Part Number 4=511-STM32F303CCT6
U2: "Gyroscope X (Pitch), Y (Roll), Z (Yaw) ±250, 500, 2000 47.5Hz ~ 380Hz I²C, SPI 16-LGA (4x4)", PartName=L3GD20TR
U3 U4: library part AMS1117, "Sot223/Pkg 1-Amp Low Drop Out Voltage Regulator", Package=None, Availability=Unavailable, MF="Advanced Monolithic Systems", MP=AMS1117-3.3, Price=None, SnapEDA_Link=https://www.snapeda.com/parts/AMS1117-3.3/Advanced%20Monolithic%20Systems/view-part/53450/?ref=snap
X1: library part XTAL8MHz, "Crystal; Frequency: 8MHz; Frequency", Package=None, Availability=Unavailable, MF="AEL Crystals", MP=X14M745600L225, Price=None, SnapEDA_Link=https://www.snapeda.com/parts/X14M745600L225/AEL%20Crystals/view-part/380339/?ref=snap
X2: "Crystal Oscillator", LatestRevisionDate=17-Jul-2002, LatestRevisionNote="Re-released for DXP Platform.", PackageDescription="Crystal, Thru-Hole; 2 Leads; Body 3.1 x 8.2 mm (Dia.xH)", PackageReference=R38, Published=8-Jun-2000, Publisher="Altium Limited"

## Via types
v1: diameter 0.6, hole 0.3, Top Layer to Bottom Layer, tented both sides, 29 vias
v2: diameter 0.8, hole 0.5, Top Layer to Bottom Layer, tented both sides, 1 vias

## Nets (pads, with @x,y where several pads share a name; then routed paths per layer and width w, separated by ;. In a path a pad name is that pad's centre, name@x,y a point inside that pad or via, vN(x,y) a via of type N, cw(c..) or ccw(c..) an arc to the next point about the centre after c; other vN are vias at no path point)
+3V3: B1.1 B1.3 C3.2 C4.2 C7.2 C8.2 C9.2 C13.1 C15.1 C17.1 D4.1 F1.1 R1.2 R6.1 R8.2 U1.24 U1.36 U1.48 U2.1 U2.15 U2.16 | length 13.4
  Top Layer w0.254: U1.48 U1.48@27.759,28.941 ; U2.16@32.9,12.99 U2.16 U2.15 ; U1.24@33.227,21.635 U1.24@33.25,21.612
  Top Layer w0.3: C13.1 C13.1@17.05,28.866
  Bottom Layer w0.254: F1.1@19.5,21.984 19.484,22 F1.1@19.5,22.016 ; C17.1@21.762,25.365 C17.1
  Bottom Layer w0.3: R8.2 14.932,25.115 15.29,24.757 15.843,24.757 v1(16.4,24.2) ; B1.1 19.35,21.65 F1.1@19.5,21.5 ; F1.1@19.5,21.984 F1.1@19.5,21.5 ; F1.1@19.5,22.016 D4.1 C17.1@21.762,25.365 ; F1.1 F1.1@19.5,21.5 ; R1.2 38.544,28.76 v1(39.94,28.76)
+3V3_E: D4.2 U4.4 | length 6.3
  Bottom Layer w0.3: U4.4 16.769,27.955 17.449,28.635 D4.2
+5V: C16.1 D1.1 D3.1 D5.2 RECEIVER.1 TELEMETRY.1 | length 77.7
  Bottom Layer w0.254: D1.1 D1.1@42.1,17.365
  Bottom Layer w0.3: RECEIVER.1 5.88,31.38 4.7,30.2 4.7,17.4 5.5,16.6 22.503,16.6 C16.1 ; D3.1@19.035,14.9 D3.1 19.935,14.935 20.4,15.4 22.524,15.4 22.7,15.576 C16.1 ; TELEMETRY.1 21.5,9.2 22.3,10 23.4,10 24.3,10.9 ; C16.1@22.635,16.862 D5.2 ; D1.1@42.1,17.365 42.1,14 38.1,10 25.2,10 24.3,10.9 ; C16.1 22.797,16.7 24,16.7 24.3,16.4 24.3,10.9
+5V_E: D3.2 U3.4 | length 5
  Bottom Layer w0.254: U3.4 D3.2@18.455,11.655
+5V_ST: D1.2 ST-LINK.1 | length 4.7
  Bottom Layer w0.254: ST-LINK.1 ST-LINK.1@42.52,19.9
  Bottom Layer w0.3: ST-LINK.1@42.52,19.9 44.3,19.9 45.335,18.865 D1.2
+12V: C18.1 D2.1 D5.1 R11.2 U3.3 U4.3 | length 42.6
  Top Layer w0.3: C18.1 17.8,36.6 18.1,36.3 R11.2
  Bottom Layer w0.3: 9.921,19.571 9.1,20.393 9.1,28.8 12.9,32.6 15.076,32.6 15.79,33.314 U4.3 ; C18.1@17.651,39.251 C18.1
  Bottom Layer w0.4: 9.921,19.571 14.754,19.571 U3.3@15.79,18.535 ; U4.3 15.79,38.19 16.851,39.251 C18.1@17.651,39.251
  Bottom Layer w0.5: U3.3@15.79,18.535 U3.3 17.845,18.345 18.6,19.1 D5.1 ; U4.3 18.02,34.645 D2.1
+12V_E: 7-12V.1 D2.2 | length 8.1
  Bottom Layer w0.5: D2.2 18.235,37.7 24.607,37.7 24.9,37.993 24.9,39.05 7-12V.1 7-12V.1@25,39.2
BOOT0: R1.1 R2.1 U1.44 | length 14.5
  Top Layer w0.254: U1.44 29.75,31.083 29.8,31.133 v1(29.8,31.2)
  Bottom Layer w0.254: v1(29.8,31.2) 33.73,31.2 38.246,26.684 R1.1 R2.1
C1: C14.1 U2.14 | length 3.5
  Top Layer w0.254: v1(31.7,14.3) 32.9,14.3 U2.14
  Bottom Layer w0.254: C14.1@31.116,12.2 31.116,13.716 v1(31.7,14.3)
CH1_S: RECEIVER.3 U1.15 | length 37.5
  Top Layer w0.254: RECEIVER.3 7.451,26.251 6.351,26.251 5.5,25.4 5.5,17.567 7.767,15.3 24.6,15.3 28.75,19.45 U1.15
CH2_S: RECEIVER.4 U1.11 | length 28.5
  Top Layer w0.254: RECEIVER.4 7.54,23.76 9,22.3 9,20.5 9.6,19.9 9.6,18.2 10.8,17 23.7,17 24.6,17.9 24.6,21.858 25.383,22.641 26.441,22.641 U1.11
CH3_S: RECEIVER.5 U1.12 | length 26.2
  Top Layer w0.254: RECEIVER.5 9.1,19.62 9.1,17.9 10.6,16.4 23.9,16.4 26.45,18.95 U1.12
CH4_S: RECEIVER.6 U1.13 | length 24.2
  Top Layer w0.254: RECEIVER.6 10.28,15.9 24.1,15.9 27.75,19.55 U1.13
ESC1_S: M1.1 U1.16 | length 91.7
  Top Layer w0.254: U1.16 29.25,19.05 21.3,11.1 19.1,11.1 15.2,7.2 15.2,4.2 16.7,2.7 43,2.7 46,5.7 46,37.6 M1.1
ESC2_S: M2.1 U1.17 | length 49.3
  Top Layer w0.254: U1.17 29.75,18.908 21.342,10.5 19.4,10.5 15.7,6.8 15.7,5.6 15.7,4.6 16.9,3.4 37,3.4 M2.1
ESC3_S: M3.1 U1.18 | length 32.8
  Top Layer w0.254: v1(17.2,7.1) 20,9.9 21.5,9.9 30.25,18.65 U1.18
  Bottom Layer w0.254: M3.1 7.308,10.9 8.5,10.9 12.3,7.1 v1(17.2,7.1)
ESC4_S: M4.1 U1.19 | length 68.8
  Top Layer w0.254: v1(4.7,14.4) 4.2,14.9 4.2,34 11.791,41.591 11.791,41.801 M4.1 ; v1(18.908,7.892) 18.908,7.908 20.3,9.3 21.6,9.3 30.75,18.45 U1.19
  Bottom Layer w0.254: v1(4.7,14.4) 5.9,14.4 12.4,7.9 18.9,7.9 v1(18.908,7.892)
GND: 7-12V.2 7-12V.3 C1.2 C2.2 C3.1 C4.1 C5.1 C6.2 C7.1 C8.1 C9.1 C10.2 C11.2 C12.2 C13.2 C14.2 C15.2 C16.2 C17.2 C18.2 LD1.1 LD2.1 M1.3 M2.3 M3.3 M4.3 R2.2 R10.1 RECEIVER.2 ST-LINK.5 TELEMETRY.4 U1.8 U1.23 U1.35 U1.47 U2.8 U2.9 U2.10 U2.11 U2.12 U2.13 U3.1 U4.1 | length 59.4
  Top Layer w0.254: v2(13,30.9) 14.584,30.9 14.684,30.8 C15.2 ; C13.2 C15.2 ; C5.1 19.484,22.254 20.735,23.505 20.735,23.819 R10.1 21.116,24.454 20.735,24.835 20.365,24.835 19.535,25.665 19.465,25.665 19.084,26.046 C8.1 C9.1 C3.1 C4.1 16.7,34.3 14.884,32.484 C15.2 ; v1(24.3,24.9) 25.05,24.15 U1.8 26.459,24.141 27.383,24.141 28.625,22.9 29.3,22.9 31.4,25 v1(32.3,25) ; U1.47@28.259,28.941 U1.47 28.259,28.959 28.259,30.059 28.6,30.4 v1(28.7,30.4) ; U1.23 32.75,23.25 32.3,23.7 v1(32.3,25) ; U2.13 32.905,15.505 33.065,15.665 U2.12 33.66,15.7 36.297,15.7 ; U1.35 34.541,27.141 33.341,27.141 32.3,26.1 v1(32.3,25) ; U2.8 36.297,14.947 36.297,15.7 ; v1(36.3,18.6) 36.297,18.597 36.297,15.7 ; LD1.1 39.6,36.43 39.6,32.98 ST-LINK.5
LD1: LD1.2 R11.1 | length 19.1
  Top Layer w0.3: R11.1 28.4,36.3 31,38.9 36.386,38.9 37.1,38.186 37.1,36.53 LD1.2
LD2: LD2.2 R12.2 | length 3
  Bottom Layer w0.254: R12.2 38.116,15.519 38.497,15.9 39.2,15.9 40.1,16.8 LD2.2 ; LD2.2@40.2,16.8 LD2.2@40.2,16.87
NetB1_2: B1.2 B1.4 C19.2 R9.2 R10.2 | length 18.4
  Top Layer w0.254: B1.2 18.365,24.835 18.703,24.835 19.084,24.454 R10.2
  Bottom Layer w0.254: B1.4 10.689,26.289 11.689,26.289 11.9,26.5 15.8,26.5 16.011,26.289 16.911,26.289 17.157,26.043 17.157,25.019 17.595,24.581 17.595,23.895 16.8,23.1 C19.2 14.916,22.846 14.535,22.465 14.281,22.465 13.551,21.735 13.265,21.735 12.884,21.354 R9.2
NetC5_2: C5.2 R6.2 U1.1 | length 11.4
  Top Layer w0.254: C5.2 23.051,22 23.2,22.149 23.2,26.3 24.55,27.65 U1.1
  Bottom Layer w0.254: R6.2 v1(23.2,23.5)
NetC11_1: C11.1 C12.1 F1.2 U1.9 | length 14.5
  Top Layer w0.254: v1(24.5,23.6) 24.541,23.641 26.441,23.641 U1.9
  Bottom Layer w0.254: F1.2 23.7,21.4 ; v1(24.5,23.6) 24.5,22.2 23.7,21.4 ; C12.1 26.416,17.616 C11.1 26.4,18.7 23.7,21.4
NetC19_1: C19.1 R8.1 | length 2.1
  Bottom Layer w0.3: C19.1 12.9,23.116 R8.1
NRST: ST-LINK.2 U1.7 | length 19.4
  Top Layer w0.254: U1.7 27.939,24.65 v1(28.524,24.065)
  Bottom Layer w0.254: v1(28.524,24.065) 33.089,19.5 39.3,19.5 42.26,22.46 ST-LINK.2
PA0: R9.1 U1.10 | length 13.9
  Top Layer w0.254: v1@17.4,19.5 21.6,19.5 25.25,23.15 U1.10
  Bottom Layer w0.254: R9.1 15.272,20.744 15.656,20.744 16.9,19.5 v1(17.6,19.5)
PA4: U1.14
PA8: U1.29
PA11: U1.32
PA12: U1.33
PA15: U1.38
PB2: U1.20
PB3: U1.39
PB4: U1.40
PB5: U1.41
PB8: U1.45
PB9: U1.46
PB10: U1.21
PB11: U1.22
PB12: R12.1 U1.25 | length 11.7
  Top Layer w0.254: v1(31.9,18.5) 33,18.5 34.55,20.05 U1.25
  Bottom Layer w0.254: v1(31.9,18.5) 33.2,17.2 v1(35,17.2) 35,15.8 35.344,15.456 36.028,15.456 R12.1
PB13: U1.26
PB14: U1.27
PB15: U1.28
PC13: U1.2 | length 0
  Top Layer w0.254: U1.2 U1.2@26.459,27.141
PC14-OSC_32k_IN: R5.1 U1.3 | length 18
  Top Layer w0.254: v1(24.9,26.9) 25.15,26.65 U1.3 ; v1(25.3,31.341) 27.441,31.341 31.7,35.6 v1(31.7,37.541)
  Bottom Layer w0.254: v1(24.9,26.9) 24.9,28.895 25.3,29.295 v1(25.3,31.341) ; v1(31.7,37.541) R5.1
PF0-OSC_8M_IN: R3.1 U1.5 | length 14.2
  Top Layer w0.254: U1.5 26.459,25.641 28.817,25.641 v1(28.83,25.654)
  Bottom Layer w0.254: R3.1 26.216,32.584 27.545,31.255 27.545,31.045 26.555,30.055 26.555,29.845 28.83,27.57 v1(28.83,25.654)
PF1-OSC_8M_OUT: R4.1 U1.6 | length 20.1
  Top Layer w0.254: U1.6 27.212,25.15 27.235,25.173 28.127,25.173 28.446,24.854 v1(28.866,24.854)
  Bottom Layer w0.254: v1(28.866,24.854) 28.846,24.854 28.8,24.9 28.831,24.931 29.351,24.931 29.5,25.08 29.5,27.6 27.255,29.845 27.255,30.055 29.784,32.584 R4.1
PF15-OSC_32k_OUT: R7.1 U1.4 | length 19.9
  Top Layer w0.254: v1(24.9,26) 24.967,26 25.117,26.15 U1.4 ; v1(26,30.7) 27.5,30.7 34.293,37.493 34.652,37.493 v1(34.7,37.541)
  Bottom Layer w0.254: v1(24.9,26) 26,27.1 v1(26,30.7) ; v1(34.7,37.541) R7.1
RX: TELEMETRY.3 U1.31 | length 24.7
  Top Layer w0.254: TELEMETRY.3 26.5,7.58 26.5,10.6 35.458,19.558 35.458,19.958 37.2,21.7 37.2,24.992 37.051,25.141 34.559,25.141 U1.31
SCL: U1.42 U2.2 | length 33
  Top Layer w0.254: U1.42 30.759,28.959 30.759,30.159 31.546,30.946 37.333,30.946 37.8,30.479 37.8,11.107 37.439,10.746 34.886,10.746 34.275,11.357 U2.2
SDA: U1.43 U2.3 | length 34.5
  Top Layer w0.254: U1.43 30.259,28.959 30.259,30.359 31.3,31.4 37.533,31.4 38.5,30.433 v1(38.5,20.4) ; U2.3 34.925,11.349 35.074,11.2 37.197,11.2 37.346,11.349 37.346,20.087 37.1,20.333 v1(37.1,20.4)
  Bottom Layer w0.254: v1(37.1,20.4) v1(38.5,20.4)
SWCLK: ST-LINK.4 U1.37 | length 10.9
  Top Layer w0.254: U1.37 34.15,28.95 35.4,30.2 v1(36.9,30.2)
  Bottom Layer w0.254: v1(36.9,30.2) 39.84,30.2 ST-LINK.4
SWDIO: ST-LINK.3 U1.34 | length 15.6
  Top Layer w0.254: U1.34 36.083,26.65 36.333,26.4 v1(36.4,26.4)
  Bottom Layer w0.254: v1(36.4,26.4) 36.447,26.353 36.447,26.181 36.5,26.128 36.5,21.649 36.649,21.5 39.9,21.5 40.8,22.4 40.8,24.7 41.1,25 ST-LINK.3
TX: TELEMETRY.2 U1.30 | length 24.5
  Top Layer w0.254: TELEMETRY.2 24.04,8.84 35.004,19.804 35.004,20.146 36.7,21.842 36.7,24.492 36.551,24.641 34.559,24.641 U1.30
X1_IN: C1.1 R3.2 X1.1 | length 6.8
  Bottom Layer w0.254: C1.1 R3.2 23.216,34.6 24.9,34.6 25.7,33.8 X1.1
X1_OUT: C2.1 R4.2 X1.2 | length 7.1
  Bottom Layer w0.254: X1.2 34.1,33.8 34.916,34.616 R4.2 C2.1
X2_IN: C6.1 R5.2 X2.1 | length 4.2
  Bottom Layer w0.254: R5.2 31.65,41.266 X2.1 31.65,45.334 C6.1
X2_OUT: C10.1 R7.2 X2.2 | length 4.2
  Bottom Layer w0.254: R7.2 34.75,41.266 X2.2 34.75,45.334 C10.1
pads on no net: M1.2 M2.2 M3.2 M4.2 U2.4 U2.5 U2.6 U2.7 U3.2 U4.2

## Polygon pours and split planes (outlines as drawn)
no net on Top Layer "NONET_L01_P004" (solid, pour order 4): 42.4,35.1
+3V3 on Top Layer "+3V3_L01_P002" (solid, pour order 2): 0,0 50,0 50,50 0,50
no net on Top Layer "NONET_L01_P000" (solid, pour order 0): 53.5,11.8
GND on Bottom Layer "GND_L02_P003" (solid, pour order 3): 0,0 50,0 50,50 0,50

## Keep-outs
Keep-Out Layer:
  the board outline again, w1

## Silkscreen, mask and mechanical layers (free items; w line width, h text height)
Top Overlay:
  text "LF" at 2.254,47.254 h1.54
  text "RF" at 45.254,47.254 h1.54
  text "~" at 13.049,42.649 h4 r135
  text "-" at 38.367,41.093 h1.54 r45
  text "+" at 11,40.3 h4 r135
  text "+" at 40.1,39 h4 r45
  text "-" at 8.907,38.567 h1.54 r135
  text "~" at 42.449,36.951 h4 r45
  text "5V" at 5.154,32.046 h0.8 r270
  text "GND" at 5.154,29.846 h0.8 r270
  text "GND" at 44.846,29.054 h0.8 r90
  text "SWCLK" at 37.354,27.054 h0.8
  text "1" at 5.054,26.446 h0.8 r270
  text "SWDIO" at 37.454,24.554 h0.8
  text "2" at 5.054,24.046 h0.8 r270
  text "NRST" at 37.554,21.854 h1
  text "3" at 5.054,21.446 h0.8 r270
  text "5V" at 44.846,19.254 h0.8 r90
  text "4" at 5.054,18.846 h0.8 r270
  text "HUMA" at 10.9,13.586 h8
  text "~" at 7.451,12.949 h4 r225
  text "-" at 41.293,11.633 h1.54 r315
  text "mini" at 23.9,11.5 h3.2
  text "+" at 9.8,10.9 h4 r225
  text "+" at 39.2,9.9 h4 r315
  text "V1.1" at 27.2,9.702 h2.3
  text "-" at 11.533,8.807 h1.54 r225
  text "~" at 37.151,7.551 h4 r315
  text "5V" at 20.754,5.154 h0.8
  text "TX" at 23.254,5.154 h0.8
  text "RX" at 25.854,5.154 h0.8
  text "GND" at 28.054,5.154 h0.8
  text "LR" at 2.254,1.254 h1.54
  text "RR" at 45.254,1.254 h1.54
Bottom Overlay:
  text "W" at 8.3,44.9 h7.5 r45
  text "A" at 45.095,40.646 h9 r315
  text "C" at 0,37.901 h1.54

## Text inside footprints (layer, text, board x,y; h text height)
LD1: Top Overlay "K" at 40.94,35.23 h0.76; Mechanical 15 "K" at 40.94,35.23 h0.76
LD2: Top Overlay "K" at 38.83,13.26 h0.76 r270; Mechanical 15 "K" at 38.83,13.26 h0.76 r270